# Altium PCB DualLEDDriver.PcbDoc
Units mm, origin at the board's own origin, x right, y up, seen from the top; angles counter-clockwise.
Board outline 33.5 x 85 mm, 2 copper layers (Top Layer, Bottom Layer); 46 components, 59 nets, 129 pads, 8 vias.
Unrouted connection lines stored in the file: 91.
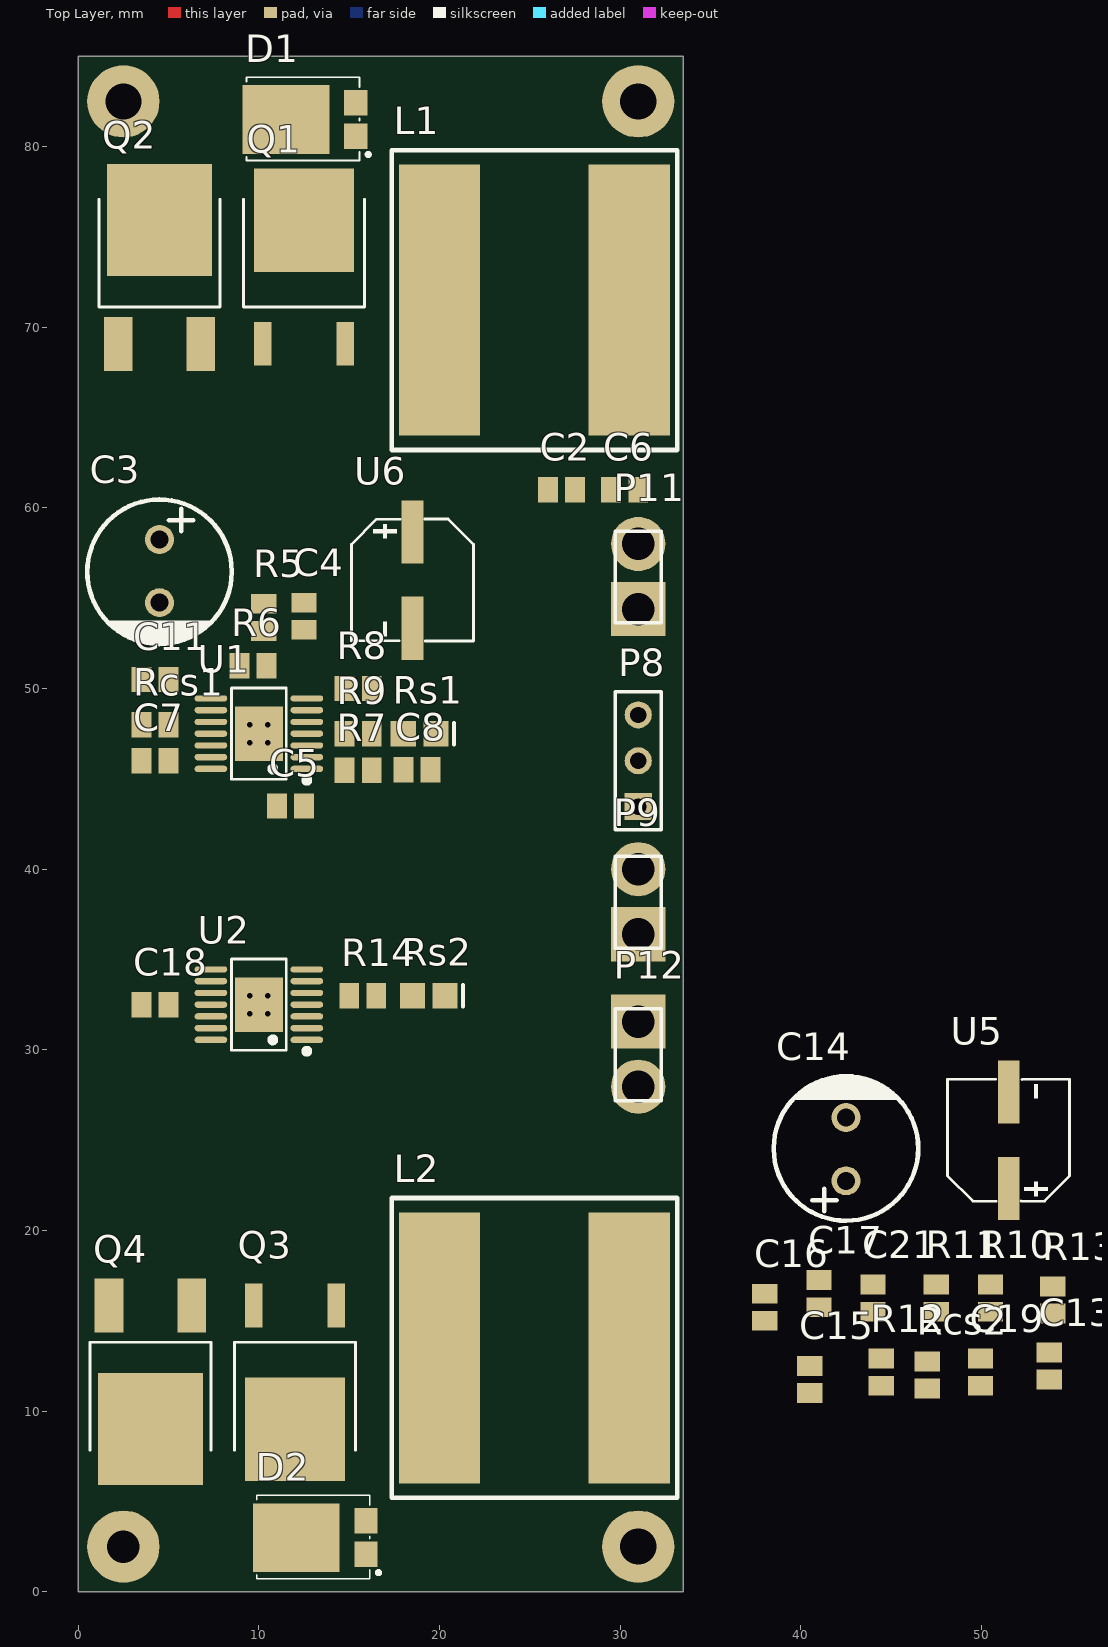
[diagram p0: Top Layer view]
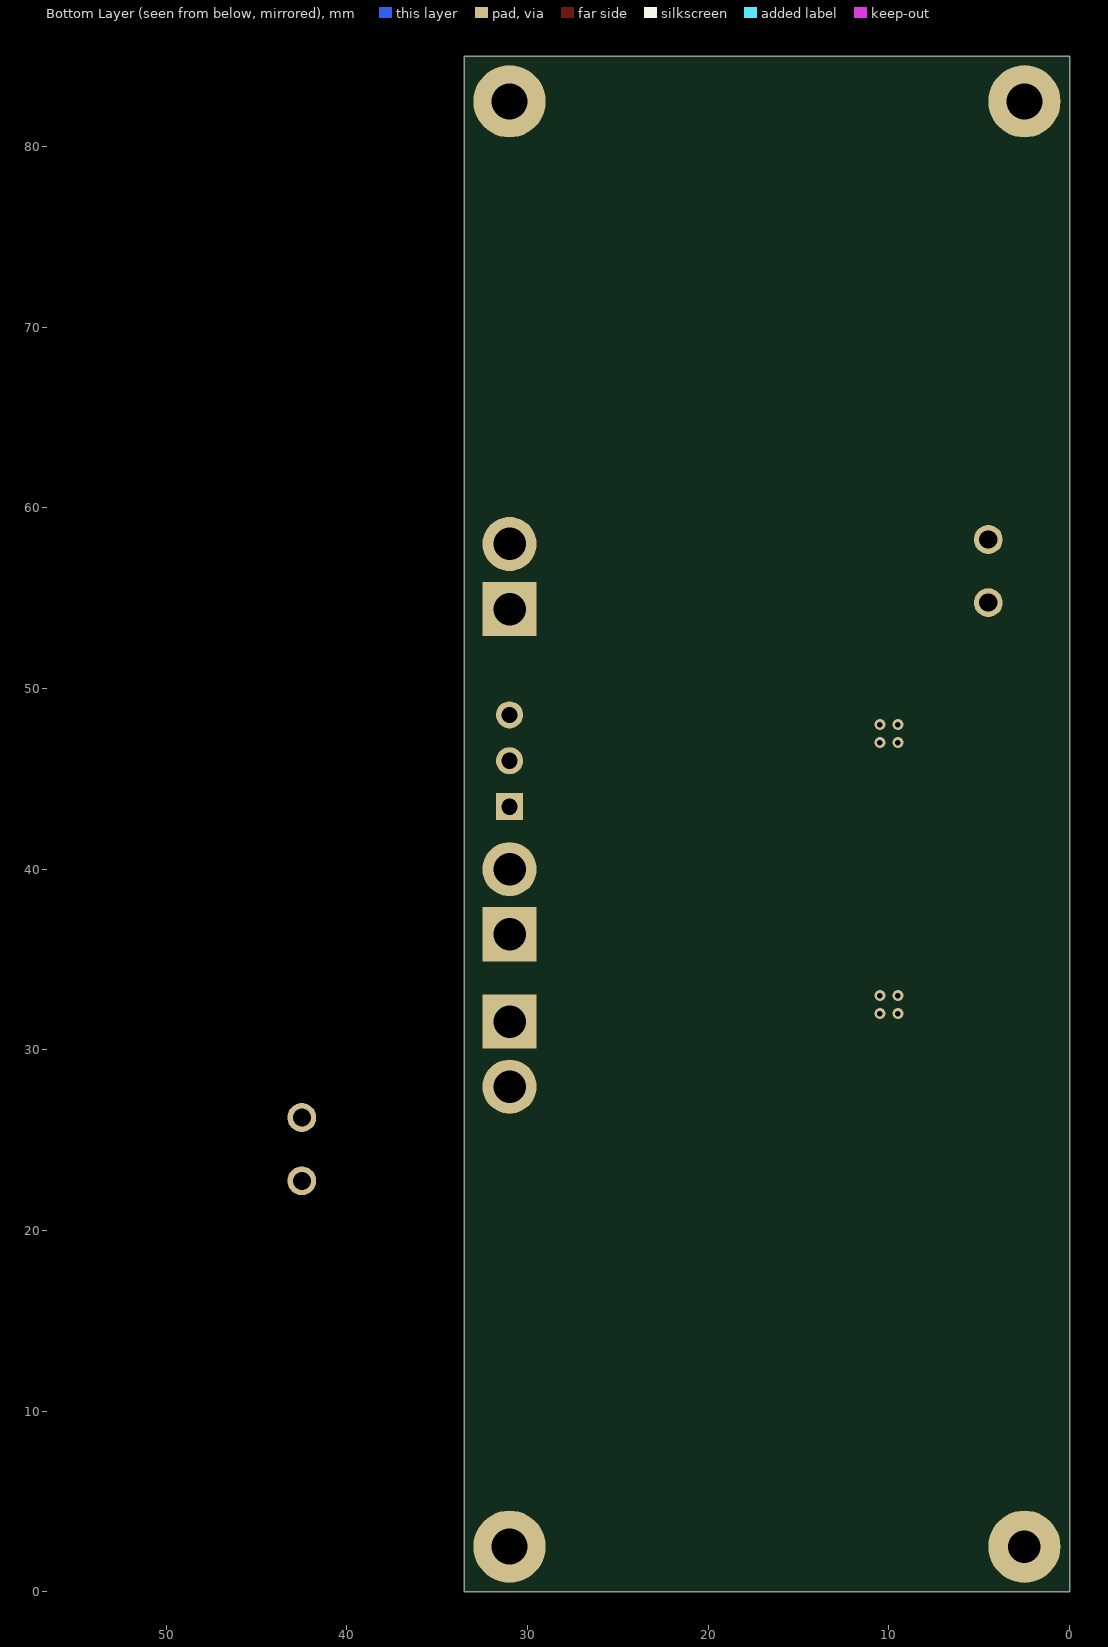
[diagram p1: Bottom Layer view, seen from below]

## Layer stack, top to bottom
Top Solder: solder mask 0.0102, Solder Resist, Dk 3.5
Top Layer: signal copper 0.0356
Dielectric 1: dielectric 0.32, FR-4, Dk 4.8
Bottom Layer: signal copper 0.0356
Bottom Solder: solder mask 0.0102, Solder Resist, Dk 3.5

## Board outline
0,0 33.5,0 33.5,85 0,85

## Design rules (kind name [scope] priority, off if disabled: settings)
Clearance [All] p1: gap=0.254 ignorepadtopadclearanceinfootprint=FALSE except(0: Arc-Hole Track-Hole SMDPad-Hole THPad-Hole Via-Hole Fill-Hole Poly-Hole Region-Hole Text-Hole)
PolygonConnect [All] p1: connectstyle=Relief reliefconductorwidth=0.254 reliefentries=4 polygonreliefangle="90 Angle" airgapwidth=0.254
RoomDefinition DualLEDDriver [InComponentClass('DualLEDDriver')] p1: confinementstyle=ConfineIn formatcopy=TRUE lockcomponents=FALSE outline 0,0 33.5,0 33.5,85 0,85
RoutingVias [All] p1: holewidth=0.711 width=1.27 viastyle="Through Hole" minholewidth=0.711 minwidth=1.27 maxholewidth=0.711 maxwidth=1.27
SolderMaskExpansion [All] p1: expansion=0.102 istentingtop=FALSE
Width [All] p1: maxlimit=0.254 minlimit=0.254 preferedwidth=0.254
30 further rules are at their usual default settings.

## Components (designator, comment, footprint, x,y, rotation, side; value= is the part's Value field where it differs from the comment)
C2 "Cap" C0805 26.75,61 r180 top value=0.1μF
C3 "KM107M050F12RR0VH2FP0" CAP-TH_BD8.0-P3.50-D0.6-FD 4.5,56.5 r270 top value=100uF
C4 "Cap" C0805 12.5,54 r90 top value=0.1μF
C5 "Cap" C0805 11.75,43.5 r180 top value=100μF
C6 "Cap Pol3" C0805 30.25,61 r180 top value=1μF
C7 "Cap" C0805 4.25,46 r180 top value=0.1μF
C8 "Cap" C0805 18.75,45.5 r180 top value=1nF
C11 "Cap" C0805 4.25,50.5 r0 top value=0.1μF
C13 "Cap" C0805 53.75,12.5 r90 top value=0.1μF
C14 "KM107M050F12RR0VH2FP0" CAP-TH_BD8.0-P3.50-D0.6-FD 42.5,24.5 r90 top value=100uF
C15 "Cap" C0805 40.5,11.75 r90 top value=0.1μF
C16 "Cap" C0805 38,15.75 r90 top value=100μF
C17 "Cap Pol3" C0805 41,16.5 r90 top value=1μF
C18 "Cap" C0805 4.25,32.5 r0 top value=0.1μF
C19 "Cap" C0805 49.95,12.155 r90 top value=1nF
C21 "Cap" C0805 44,16.25 r90 top value=0.1μF
D1 "ST20100L" TO-277_3P-L5.7-W4.2-LS6.5-BR 13.433,81.5 r0 top
D2 "ST20100L" TO-277_3P-L5.7-W4.2-LS6.5-BR 14,3 r0 top
L1 "FEXL1513A-220M" IND-SMD_L16.5-W15.5 25.25,71.5 r180 top value=22uH
L2 "FEXL1513A-220M" IND-SMD_L16.5-W15.5 25.25,13.5 r180 top value=22uH
P8 "Header 3" HDR1X3 31,43.46 r90 top
P9 "Header 2" HDR1X2#1 31,36.9 r90 top
P11 "LED 1" HDR1X2#1 31,54.9 r90 top
P12 "LED 2" HDR1X2#2 31,31 r270 top
Q1 "AP40T10GH-VB" TO-252-2_L6.6-W6.1-P4.58-LS9.9-TL 12.5,72.5 r90 top
Q2 "NCE6020AK" TO-252-2_L6.6-W6.1-P4.57-LS10.1-TL-CW 4.5,72.5 r90 top
Q3 "AP40T10GH-VB" TO-252-2_L6.6-W6.1-P4.58-LS9.9-TL 12,12.424 r270 top
Q4 "NCE6020AK" TO-252-2_L6.6-W6.1-P4.57-LS10.1-TL-CW 4,12.424 r270 top
R5 "Res1" C0805 10.271,53.941 r90 top value=150KΩ
R6 "Res1" C0805 9.671,51.262 r180 top value=2.81KΩ
R7 "Res1" C0805 15.5,45.473 r180 top value=10KΩ
R8 "Res1" C0805 15.5,50 r180 top value=130KΩ
R9 "Res1" C0805 15.5,47.5 r180 top value=10KΩ
R10 "Res1" C0805 50.5,16.25 r90 top value=150KΩ
R11 "Res1" C0805 47.5,16.25 r90 top value=2.81KΩ
R12 "Res1" C0805 44.45,12.155 r90 top value=10KΩ
R13 "Res1" C0805 53.95,16.155 r90 top value=130KΩ
R14 "Res1" C0805 15.75,33 r180 top value=10KΩ
Rcs1 "Res1" C0805 4.25,48 r0 top value=6.4mΩ
Rcs2 "Res1" C0805 47,12 r90 top value=6.4mΩ
Rs1 "Res1" C2512 18.9,47.5 r180 top value=50mΩ/3W
Rs2 "Res1" C2512 19.4,33 r180 top value=50mΩ/3W
U1 "FP7209mR-G1" TSSOP-14_L5.0-W4.4-P0.65-LS6.4-BL-EP 10,47.5 r90 top
U2 "FP7209mR-G1" TSSOP-14_L5.0-W4.4-P0.65-LS6.4-BL-EP 10,32.5 r90 top
U5 "RST100UF25V004" CAP-SMD_BD6.3-L6.6-W6.6-LS7.3-FD 51.5,25 r90 top value=100uF
U6 "RST100UF25V004" CAP-SMD_BD6.3-L6.6-W6.6-LS7.3-FD 18.5,56 r270 top value=100uF

## Footprints (in the part's own frame and the unit in brackets; to place one, negate y for a bottom-side part, rotate by r counter-clockwise, add the part's x,y. Pads: shape width x height; smd on the part's side, far side on the other; paste and mask are expansions set on the pad)
C0805 [mm] "Chip Capacitor, Body 2.0x1.3mm, IPC High Density"
  rect 1.1x1.4 smd: 1(-0.75,0) 2(0.75,0)
  body extent -1.1,-0.72 1.1,0.72, height 1.4
C2512 [mm] "Chip Capacitor, Body 2.54x1.27mm, IPC High Density"
  rect 1.4x1.4 smd: 1(-0.9,0) 2(0.9,0)
  silkscreen extent -1.9,-0.6 -1.9,0.6, body extent -1.45,-0.82 1.45,0.82, height 1.3
CAP-SMD_BD6.3-L6.6-W6.6-LS7.3-FD [mm]
  rect 3.5x1.2 smd: 1(-2.67,0) 2(2.67,0)
  silkscreen extent -3.38,-3.38 3.38,3.38
CAP-TH_BD8.0-P3.50-D0.6-FD [mm]
  round 1.6 hole 1: 1(-1.75,0) 2(1.75,0)
  silkscreen extent -3.96,-4 4.04,4
HDR1X2#1 [mm] "Connector; Header; 2 Position"
  rect 3x3 hole 1.8: 1(-0.5,0)
  round 3 hole 1.8: 2(3.1,0)
  silkscreen extent -1.27,-1.27 3.81,1.27
HDR1X2#2 [mm] "Connector; Header; 2 Position"
  rect 3x3 hole 1.8: 1(-0.56,0)
  round 3 hole 1.8: 2(3.04,0)
  silkscreen extent -1.27,-1.27 3.81,1.27
HDR1X3 [mm] "Connector; Header; 3 Position"
  rect 1.5x1.5 hole 0.9: 1(0,0)
  round 1.5 hole 0.9: 2(2.54,0) 3(5.08,0)
  silkscreen extent -1.27,-1.27 6.35,1.27
IND-SMD_L16.5-W15.5 [mm]
  rect 4.5x15 smd: 1(5.25,0) 2(-5.25,0)
  silkscreen extent -7.9,-8.3 7.9,8.3
TO-252-2_L6.6-W6.1-P4.57-LS10.1-TL-CW [mm]
  rect 3x1.6 smd: 1(-3.424,2.285) 3(-3.424,-2.285)
  rect 6.2x5.8 smd: 2(3.424,0)
  silkscreen extent -1.38,-3.35 4.58,3.35
TO-252-2_L6.6-W6.1-P4.58-LS9.9-TL [mm]
  rect 2.409x0.979 smd: 1(-3.424,2.29) 3(-3.423,-2.29)
  rect 5.711x5.548 smd: 2(3.424,0)
  silkscreen extent -1.38,-3.35 4.58,3.35
TO-277_3P-L5.7-W4.2-LS6.5-BR [mm]
  rect 1.29x1.422 smd: 1(1.933,-0.93) 3(1.933,0.93)
  rect 4.8x3.8 smd: 2(-1.933,0)
  silkscreen extent -4.12,-2.28 2.72,2.34
TSSOP-14_L5.0-W4.4-P0.65-LS6.4-BL-EP [mm]
  oval 0.35x1.809 smd: 1(-1.95,-2.655) 2(-1.3,-2.655) 3(-0.65,-2.655) 4(0,-2.655) 5(0.65,-2.655) 6(1.3,-2.655) 7(1.95,-2.655) 8(1.95,2.655) 9(1.3,2.655) 10(0.65,2.655) 11(0,2.655) 12(-0.65,2.655) 13(-1.3,2.655) 14(-1.95,2.655)
  rect 3x2.65 smd: 15(0,0)
  silkscreen extent -2.73,-2.8 2.53,1.52

## Part data
C2 C4 C5 C7 C8 C11 C13 C15 C16 C18 C19 C21: "Capacitor", LatestRevisionDate=17-Jul-2002, LatestRevisionNote="Re-released for DXP Platform.", PackageDescription="Radial Cap, Thru-Hole; 2 Leads; 0.3 in Pin Spacing", PackageReference=RAD-0.3, Published=8-Jun-2000, Publisher="Altium Limited"
C3 C14: JLCPCB Part Class="Extended Part", LCSC Part Name="100uF ±20% 50V", Lifetime @ Temp=2000hrs@105℃, Manufacturer=CX(承兴), Rated Voltage=50V, Tolerance=±20%, Add into BOM=yes, Convert to PCB=yes, Datasheet=https://atta.szlcsc.com/upload/public/pdf/source/20211027/06D6BA3719C264B639DC286D935D03EA.pdf, Device=KM107M050F12RR0VH2FP0, L=12mm, Lead Spacing=3.5mm, Manufacturer Part=KM107M050F12RR0VH2FP0, Supplier=LCSC, Supplier Footprint=插件,D8xL12mm, Supplier Part=C2749, Symbol="50V 100uF 8X12", φD=8mm
C6 C17: "Polarized Capacitor (Surface Mount)", LatestRevisionDate=29-May-2009, LatestRevisionNote="IPC-7351 Footprint Added.", PackageDescription="Chip Capacitor", PackageReference=C0805, Published=8-Jun-2000, Publisher="Altium Limited"
D1 D2: Average Rectified Current (Io)=20A, Forward Voltage (Vf@If)=650mV@20A, JLCPCB Part Class="Extended Part", LCSC Part Name="电压:100V 电流:20A", Manufacturer=CJ(江苏长电/长晶), Reverse Leakage Current (Ir)=30uA@100V, Reverse Voltage (Vr)=100V, Add into BOM=yes, Convert to PCB=yes, Datasheet=https://atta.szlcsc.com/upload/public/pdf/source/20210330/C2693410_9551F5ED840A67394421895091158B3C.pdf, Device=ST20100L, Diode Configuration=独立式, Manufacturer Part=ST20100L, Supplier=LCSC, Supplier Footprint=TO-277, Supplier Part=C2693410, Symbol=ST20100L
L1 L2: DC Resistance (DCR)=13.86mΩ, JLCPCB Part Class="Extended Part", LCSC Part Name="22uH ±20% 22A", Manufacturer=cjiang(长江微电), Rated Current=17A, Ratings=AEC-Q200, Saturation Current (Isat)=22A, Tolerance=±20%, Add into BOM=yes, Convert to PCB=yes, Datasheet=https://atta.szlcsc.com/upload/public/pdf/source/20230406/FF57C09F52BFC355BADE8D0321BD05F5.pdf, Device=FEXL1513A-220M, Manufacturer Part=FEXL1513A-220M, Supplier=LCSC, Supplier Footprint=SMD,16.5x15.5x12.7mm(1513), Supplier Part=C5378604, Symbol=FEXL1513A-220M, Type=一体成型电感
P8: "Header, 3-Pin", LatestRevisionDate=17-Jul-2002, LatestRevisionNote="Re-released for DXP Platform.", Publisher="Altium Limited"
P9: "Header, 2-Pin", LatestRevisionDate=17-Jul-2002, LatestRevisionNote="Re-released for DXP Platform.", Publisher="Altium Limited"
P11 P12: library part "Header 2", "Header, 2-Pin", LatestRevisionDate=17-Jul-2002, LatestRevisionNote="Re-released for DXP Platform.", Publisher="Altium Limited"
Q1 Q3: Continuous Drain Current (Id)=40A, Drain Source On Resistance (RDS(on)@Vgs,Id)=30mΩ@10V,40A, Drain Source Voltage (Vdss)=100V, Gate Threshold Voltage (Vgs(th)@Id)=-, JLCPCB Part Class="Extended Part", LCSC Part Name="N沟道 耐压:100V 电流:40A", Manufacturer=VBsemi(微碧半导体), Add into BOM=yes, Convert to PCB=yes, Datasheet=https://atta.szlcsc.com/upload/public/pdf/source/20230505/1A0FD829F773C85C90E545D17A9CBDF0.pdf, Device=AP40T10GH-VB, Input Capacitance (Ciss@Vds)=-, Manufacturer Part=AP40T10GH-VB, Power Dissipation (Pd)=-, Reverse Transfer Capacitance (Crss@Vds)=-, Supplier=LCSC, Supplier Footprint=TO-252-2, Supplier Part=C693118, Symbol=AP40T10GH, Total Gate Charge (Qg@Vgs)=-, Type=N沟道
Q2 Q4: Continuous Drain Current (Id)=20A, Drain Source On Resistance (RDS(on)@Vgs,Id)=35mΩ@10V,20A, Drain Source Voltage (Vdss)=60V, Gate Threshold Voltage (Vgs(th)@Id)=2.5V@250uA, JLCPCB Part Class="Extended Part", LCSC Part Name="N沟道 耐压:60V 电流:20A", Manufacturer=NCE(无锡新洁能), Power Dissipation (Pd)=45W, Add into BOM=yes, Convert to PCB=yes, Datasheet=https://atta.szlcsc.com/upload/public/pdf/source/20231201/F7F8CF8E769EE35C01C69D8E45471040.pdf, Device=NCE6020AK, Manufacturer Part=NCE6020AK, Supplier=LCSC, Supplier Footprint=TO-252-2(DPAK), Supplier Part=C108639, Symbol=NCE6020AK, Type=N沟道
R5 R6 R7 R8 R9 R10 R11 R12 R13 R14 Rcs1 Rcs2 Rs1 Rs2: "Resistor", LatestRevisionDate=17-Jul-2002, LatestRevisionNote="Re-released for DXP Platform.", PackageDescription="Axial Device, Thru-Hole; 2 Leads; 0.3 in Pin Spacing", PackageReference=AXIAL-0.3, Published=8-Jun-2000, Publisher="Altium Limited"
U1 U2: JLCPCB Part Class="Extended Part", Manufacturer="Advanced Analog Technology(类比)", Add into BOM=yes, Convert to PCB=yes, Datasheet=https://atta.szlcsc.com/upload/public/pdf/source/20210915/BA17F30BBB4CEE378D5F258F3F58057A.pdf, Device=FP7209mR-G1, LCSC Part Name=FP7209mR-G1, Manufacturer Part=FP7209mR-G1, Supplier=LCSC, Supplier Footprint=TSSOP-14-EP, Supplier Part=C2762848, Symbol=FP7209MR-G1
U5 U6: Equivalent Series Resistance(ESR)=-, JLCPCB Part Class="Extended Part", LCSC Part Name="100uF ±20% 25V", Lifetime @ Temp=2000hrs@105℃, Manufacturer=KNSCHA(科尼盛), Operating Temperature=-40℃~+105℃, Rated Voltage=25V, Ripple Current=88mA@120Hz, Tolerance=±20%, Add into BOM=yes, Convert to PCB=yes, Datasheet=https://atta.szlcsc.com/upload/public/pdf/source/20220722/52F6C209ACF875FF59C64C72CE2329EE.pdf, Device=RST100UF25V004, L=5.4mm, Manufacturer Part=RST100UF25V004, Supplier=LCSC, Supplier Footprint=SMD,D6.3xL5.4mm, Supplier Part=C4747964, Symbol=RST100UF25V004, φD=6.3mm

## Free pads (board coordinates)
  round 4 hole 2: 3(2.5,82.5) 4(31,82.5) 6(31,2.5)
  round 4 hole 1.8: 5(2.5,2.5)

## Via types
v1: diameter 0.61, hole 0.305, Top Layer to Bottom Layer, 8 vias

## Nets (pads, with @x,y where several pads share a name; then routed paths per layer and width w, separated by ;. In a path a pad name is that pad's centre, name@x,y a point inside that pad or via, vN(x,y) a via of type N, cw(c..) or ccw(c..) an arc to the next point about the centre after c; other vN are vias at no path point)
GND: C2.1 C3.2 C4.1 C5.2 C6.2 C7.1 C8.2 C11.1 C13.1 C14.2 C15.1 C16.2 C17.2 C18.1 C19.2 C21.1 P9.2 R6.2 R8.1 R11.2 R13.1 Rcs1.1 Rcs2.1 Rs1.1 Rs2.1 U1.12 U1.13 U1.15 U2.12 U2.13 U2.15 U5.2 U6.2
  other v1: 9.505,32.005 10.495,32.005 9.505,32.995 10.495,32.995 9.505,47.005 10.495,47.005 9.505,47.995 10.495,47.995
NetC2_2: C2.2 C7.2 C13.2 C18.2 L1.2 L2.2 P9.1 pad.6 U1.11 U2.11 U5.1 U6.1
NetC3_1: C3.1 C4.2 D1.2 P11.1 R5.2
NetC5_1: C5.1 U1.1
NetC6_1: C6.1 P11.2 Q2.2
NetC8_1: C8.1 R7.1
NetC9_1: 
NetC10_1: 
NetC11_2: C11.2 U1.8
NetC14_1: C14.1 C15.2 D2.2 P12.1 R10.2
NetC16_1: C16.1 U2.1
NetC17_1: C17.1 P12.2 Q4.2
NetC19_1: C19.1 R12.1
NetC20_2: 
NetC21_2: C21.2 U2.8
NetCOMM1_2: 
NetCOMM1_3: 
NetCOMM1_4: 
NetCOMM1_5: 
NetCOMM1_6: 
NetCOMM1_8: 
NetCOMM1_10: 
NetCOMM1_11: 
NetCOMM1_12: 
NetCOMM1_13: 
NetCOMM1_18: 
NetCOMM1_19: 
NetCOMM1_20: 
NetCOMM1_21: 
NetCOMM1_22: 
NetD1_1: D1.1 L1.1 Q1.2
NetD2_1: D2.1 L2.1 Q3.2
NetDC1_3: 
NetP2_1: 
NetP2_2: 
NetP8_1: P8.1 U1.2
NetP8_2: P8.2 U2.2
NetP8_3: P8.3 U1.3 U2.3
NetP10_1: 
NetP10_2: 
NetP10_3: 
NetQ1_1: Q1.1 U1.14
NetQ1_3: Q1.3 Rcs1.2 U1.10
NetQ2_1: Q2.1 U1.9
NetQ2_3: Q2.3 R9.1 Rs1.2
NetQ3_1: Q3.1 U2.14
NetQ3_3: Q3.3 Rcs2.2 U2.10
NetQ4_1: Q4.1 U2.9
NetQ4_3: Q4.3 R14.1 Rs2.2
NetR3_1: 
NetR4_1: 
NetR5_1: R5.1 R6.1 U1.6
NetR7_2: R7.2 U1.4
NetR8_2: R8.2 U1.7
NetR9_2: R9.2 U1.5
NetR10_1: R10.1 R11.1 U2.6
NetR12_2: R12.2 U2.4
NetR13_2: R13.2 U2.7
NetR14_2: R14.2 U2.5
pads on no net: D1.3 D2.3